# Allegro board ECG_v5.brd
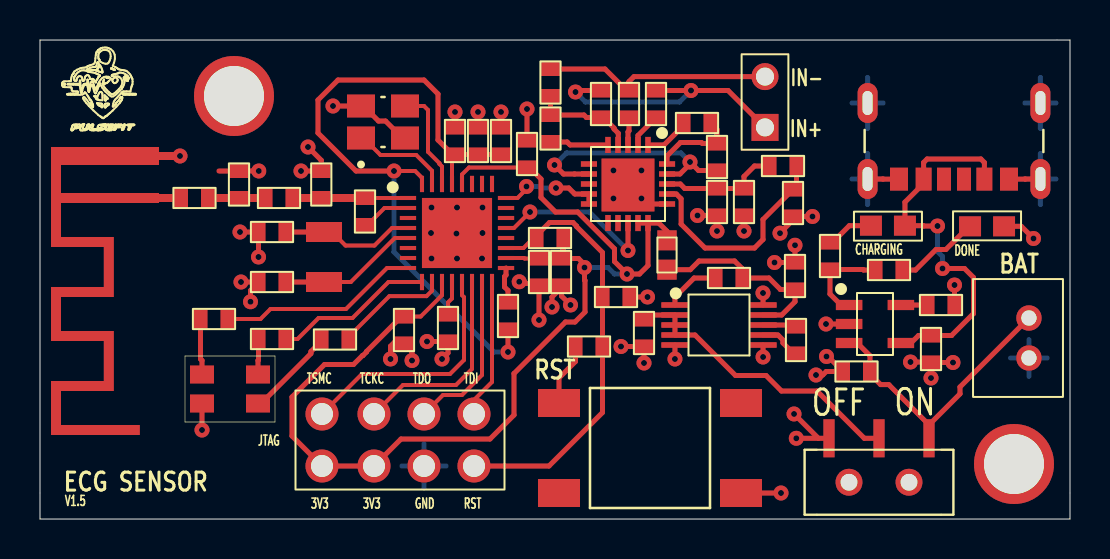
[diagram p0: board, top side]
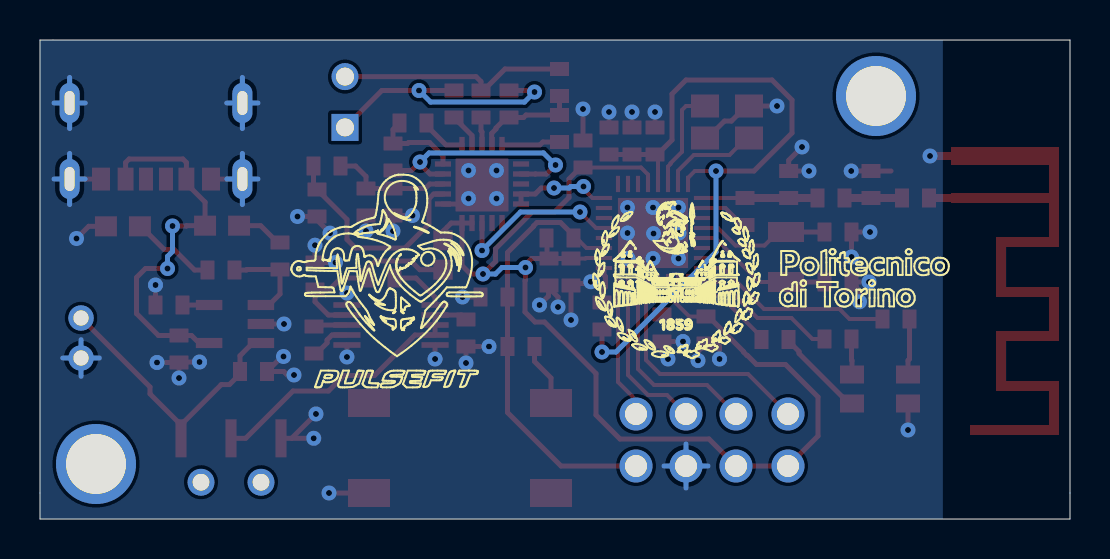
[diagram p1: board, bottom side, seen from below]

Outline 51.5 x 23.95 mm; copper layers: TOP, BOTTOM. Coordinates in mm from the lower left corner of the outline.
Outline path: 0,23.95 51.5,23.95 51.5,0 0,0 0,23.95

## Design rules (mm)
constraint set DEFAULT: min track width 0.15

## Placement (name value [footprint] x y rotation side)
A1  ANTENNA  [AN043_PATCH_ANTENNA]  5.45 19.1 90 top
C1  100nF  [0603_C]  28.8 11.1 0 top
C2  12 pF  [0603_C]  11.6 14.35 0 top
C3  12 pF  [0603_C]  11.6 11.85 0 top
C4  12 pF  [0603_C]  7.73 16.05 0 top
C5  1.2 pF  [0603_C]  14.07 16.73 270 top
C6  1.2 pF  [0603_C]  9.95 16.73 270 top
C7  1 uF  [0603_C]  20.4 9.55 90 top
C8  100 nF  [0603_C]  18.2 9.45 90 top
C9  100 nF  [0603_C]  24.35 18.25 270 top
C10  10 uF  [0603_C]  24.95 12.35 90 top
C11  100 nF  [0603_C]  26.05 12.35 90 top
C12  10 uF  [0603_C]  21.9 18.9 270 top
C13  100 nF  [0603_C]  23.05 18.9 270 top
C14  100 nF  [0603_C]  20.75 18.9 270 top
C15  0.33 uF  [0603_C]  37.8 8.95 270 top
C16  10uF  [0603_C]  37.75 12.15 90 top
C17  10 uF  [0603_C]  30.2 9.3 90 top
C18  4.7uF  [0603_C]  44.55 8.5 90 top
C19  4.7uF  [0603_C]  40.83 7.38 0 top
C20  0.22uF  [0603_C]  32.85 19.8 180 top
C21  1nF  [0603_C]  25.53 19.52 270 top
C22  0.1uF  [0603_C]  37.65 15.8 270 top
C23  0.1uF  [0603_C]  33.85 15.85 270 top
CN1  3-644456-2  [TE_3-644456-2]  36.25 19.58 90 top
CN2  B2B-PH-K-S  [CONN2]  49.45 8.05 270 top
D1  RGB  [RGB_LED]  9.5 6.5 0 top
D2  LTST-S270KGKT  [LED_SMD]  47.35 14.63 180 top
D3  LTST-S270KGKT  [LED_SMD]  42.4 14.67 0 top
FB1  INDUCTOR  [BEADC1608X95N]  31.35 13.2 90 top
J1  4X2  [HEADER4X2]  18 3.95 180 top
J2  UJC-HP-3-SMT-TR  [CUI_UJC-HP-3-SMT-TR]  45.7 17 180 top
L1  15 nH  [0603_L]  16.25 15.38 90 top
L2  2 nH  [0603_L]  11.95 16.05 180 top
L3  10 uH  [0603_L]  23.4 10.15 270 top
NOREF  -  [unnamed]  9.7 21.15 0 top
NOREF#2  -  [#2]  0.92 19.25 0 top
NOREF#3  -  [unnamed]  48.7 2.75 0 top
NOREF#4  -  [#2]  39.35 6.12 180 bottom
NOREF#5  -  [#2]  23.86 8.01 180 bottom
R1  100  [0603_R]  14.75 8.97 180 top
R2  100  [0603_R]  11.6 9 180 top
R3  270  [0603_R]  8.7 10 180 top
R4  10k  [0603_R]  25.5 14.05 180 top
R5  330  [0603_R]  27.45 8.62 180 top
R6  100 k  [0603_R]  34.45 12.05 180 top
R7  8.2k  [0603_R]  45.05 10.7 180 top
R8  150  [0603_R]  39.5 13.15 90 top
R9  150  [0603_R]  42.45 12.45 180 top
R10  180k  [0603_R]  30.8 20.75 90 top
R11  10M  [0603_R]  33.85 18.1 270 top
R12  180k  [0603_R]  29.45 20.75 270 top
R13  10M  [0603_R]  28.05 20.75 270 top
R14  10M  [0603_R]  25.53 21.82 270 top
R15  10M  [0603_R]  37.15 17.65 180 top
R16  10M  [0603_R]  35.2 15.85 270 top
S2  FSM2JSMA  [BUTTON_SMD]  30.5 3.55 0 top
SW1  -  [SWITCH_102AGRLC]  41.95 1.84 90 top
U1  CC2640R2LRHBR  [CC2640]  20.85 14.3 0 top
U2  MAX1759EUB  [MAX1759]  33.95 9.7 0 top
U3  -  [MCP73831]  41.75 9.75 0 top
U4  -  [AD8232]  29.4 16.75 0 top
Y1  TSX-3225_240000MF20X-AC0  [XTAL_24MHZ]  17.15 19.85 90 top
Y2  FC-135R_327680KA-AG0  [XTAL_32_768KHZ]  14.2 13.1 270 top

## Library data of the parts
A1 = ANTENNA_1
C1 C15-C23 = C_1
C2-C14 = Capacitor
CN1 CN2 = 3-644456-2
D1 = XZM2CRKM2DGFBB45SCCB
D2 D3 = LTST-S270KGKT
FB1 = INDUCTOR
J1 = 5X5
J2 = UJC-HP-3-SMT-TR
L1-L3 = Inductor
R1-R16 = R
S2 = 2-1437565-7
SW1 = AYZ0102AGRLC
U1 = CC2640R2LRHBR
U2 = MAX1759EUB
U3 = MCP73831T-2ACIOT_0
U4 = AD8232ACPZ-WP_5
Y1 = TSX-3225_0
Y2 = FC-135R_0

## Footprints (pads in the part's own frame, mm; a bottom-side part is the same pattern mirrored in y, then rotated)
0603_C
  rect 0.7x0.95 smd: 1(-0.675,0) 2(0.675,0)
0603_L
  rect 0.7x0.95 smd: 1(-0.675,0) 2(0.675,0)
0603_R
  rect 0.7x0.95 smd: 1(-0.675,0) 2(0.675,0)
AD8232
  rect 0.275x0.805 smd: 1(1,1.952) 2(0.5,1.952) 3(0,1.952) 4(-0.5,1.952) 5(-1,1.952) 11(-1,-1.952) 12(-0.5,-1.952) 13(0,-1.952) 14(0.5,-1.952) 15(1,-1.952)
  rect 0.805x0.275 smd: 6(-1.952,1) 7(-1.952,0.5) 8(-1.952,0) 9(-1.952,-0.5) 10(-1.952,-1) 16(1.952,-1) 17(1.952,-0.5) 18(1.952,0) 19(1.952,0.5) 20(1.952,1)
  rect 2.65x2.65 smd: HTAB(0,-0.05)
AN043_PATCH_ANTENNA
  rect 0.9x0.5 smd: 1(-0.95,-0.25)
  rect 0.5x0.5 smd: 2(-3.05,-0.25)
BEADC1608X95N
  rect 1x0.97 smd: 1(-0.735,0) 2(0.735,0)
BUTTON_SMD
  rect 2.1x1.4 smd: 1(-4.55,2.25) 2(4.55,2.25) 3(-4.55,-2.25) 4(4.55,-2.25)
CC2640
  rect 0.813x0.203 smd: 1(-2.451,1.75) 2(-2.451,1.25) 3(-2.451,0.75) 4(-2.451,0.25) 5(-2.451,-0.25) 6(-2.451,-0.75) 7(-2.451,-1.25) 8(-2.451,-1.75) 17(2.451,-1.75) 18(2.451,-1.25) 19(2.451,-0.75) 20(2.451,-0.25) 21(2.451,0.25) 22(2.451,0.75) 23(2.451,1.25) 24(2.451,1.75)
  rect 0.203x0.813 smd: 9(-1.75,-2.451) 10(-1.25,-2.451) 11(-0.75,-2.451) 12(-0.25,-2.451) 13(0.25,-2.451) 14(0.75,-2.451) 15(1.25,-2.451) 16(1.75,-2.451) 25(1.75,2.451) 26(1.25,2.451) 27(0.75,2.451) 28(0.25,2.451) 29(-0.25,2.451) 30(-0.75,2.451) 31(-1.25,2.451) 32(-1.75,2.451)
  rect 3.505x3.505 smd: 33(0,0)
CONN2
  round 1.27 hole 0.762: 1(0,0) 2(-2,0)
CUI_UJC-HP-3-SMT-TR
  rect 0.7x1.15 smd: A5(-0.5,0.005) B5(0.5,0.005)
  rect 0.8x1.15 smd: A9(1.52,0.005) B9(-1.52,0.005)
  rect 0.9x1.15 smd: A12(2.75,0.005) B12(-2.75,0.005)
  oval 1x2 hole 0.5x1.2: S1(-4.32,0) S2(4.32,0) S3(-4.32,-3.8) S4(4.32,-3.8)
HEADER4X2
  round 1.65 hole 1.1: 1(-3.7,-1.3) 2(-3.7,1.3) 3(-1.2,-1.3) 4(-1.2,1.3) 5(1.3,-1.3) 6(1.3,1.3) 7(3.9,-1.3) 8(3.9,1.3)
LED_SMD
  rect 1.1x1 smd: 1(-0.85,0) 2(0.85,0)
MAX1759
  rect 1.359x0.279 smd: 1(-2.203,1) 2(-2.203,0.5) 3(-2.203,0) 4(-2.203,-0.5) 5(-2.203,-1) 6(2.203,-1) 7(2.203,-0.5) 8(2.203,0) 9(2.203,0.5) 10(2.203,1)
MCP73831
  rect 1.321x0.508 smd: 1(-1.295,0.95) 2(-1.295,0) 3(-1.295,-0.95) 4(1.295,-0.95) 5(1.295,0.95)
RGB_LED
  rect 1.2x0.9 smd: 1(-1.4,0.725) 2(1.4,0.725) 3(1.4,-0.725) 4(-1.4,-0.725)
SWITCH_102AGRLC
  round 1.346 hole 0.838: (0,1.5) (0,-1.5)
  rect 1.905x0.559 smd: 1(2.197,2.5) 2(2.197,0) 3(2.197,-2.5)
TE_3-644456-2
  rect 1.35x1.35 hole 0.9: 1(0,0)
  round 1.35 hole 0.9: 2(2.54,0)
unnamed
  round 4 hole 3 unplated: (0,0)
XTAL_24MHZ
  rect 1.15x1.4 smd: 1(-0.8,1.1) 2(-0.8,-1.1) 3(0.8,-1.1) 4(0.8,1.1)
XTAL_32_768KHZ
  rect 1x1.8 smd: 1(-1.25,0) 2(1.25,0)

## Nets
3.3V: C8.2(B) C9.2(B) C10.2(B) C11.2(B) FB1.2 J1.6 J1.8 R4.1 U1.11 U1.18 U1.28 U4.14 U4.15
GND: A1.1(GND) C1.2 C2.1 C3.1 C5.1 C6.1 C7.1 C8.1 C9.1 C10.1 C11.1 C12.1 C13.1 C14.1 C16.2 C17.1 C18.1 C19.1 C22.2 C23.2 CN2.1 D1.4 D2.1(K2) J1.4 J2.A12 J2.B12 J2.S1 J2.S2 J2.S3 J2.S4 R7.1 R16.2 S2.4 SW1.1 U1.33 U2.5 U2.6 U2.10 U3.2(VSS) U4.16 U4.HTAB Y1.2 Y1.4(GND#4)
VBAT: C19.2 CN2.2 SW1.3 U3.3
VDDR: C12.2(B) C13.2(B) C14.2(B) L3.2(B) U1.29 U1.32
VIN: C17.2 SW1.2 U2.2 U2.3 U2.4
DCDC_SW: L3.1 U1.17
DCOUPL: C7.2(B) U1.12
ECG: U1.24 U4.9 U4.10
IAOUT: R11.2 U4.7 U4.19
IN+: CN1.1 R10.2 R13.1
IN-: CN1.2 R12.1 R14.1
JTAG_TCKC: J1.5 U1.14
JTAG_TDI: J1.1 U1.16
JTAG_TDO: J1.3 U1.15
JTAG_TMSC: J1.7 U1.13
LED_G: D2.2 R9.1
LED_R: D3.1(K2) R8.2
MCP_STAT: R8.1 R9.2 U3.1
RESET_N: C1.1 J1.2 R4.2 R5.1 U1.19
RF_N: L1.1 U1.2
RF_P: C5.2(B) L1.2(B) L2.1 U1.1
RGB_BLUE: R1.1 U1.10
RGB_GREEN: R2.1 U1.9
RGB_RED: R3.1 U1.8
SDN: U1.21 U4.13
VUSB: C18.2 D3.2 J2.A9 J2.B9(V-BUS#B9) U3.4
X24_N: U1.30 Y1.3
X24_P: U1.31 Y1.1
X32K_Q1: C2.2(B) U1.4 Y2.1
X32K_Q2: C3.2(B) U1.5(X32K_Q2) Y2.2
N71434: C4.2(B) C6.2(B) L2.2(B)
N75000: C15.1 U2.8
N75037: R6.2 U2.1(POK)
N75059: C16.1 FB1.1 R6.1 U2.9
N76094: R7.2 U3.5
N78042: R10.1 U4.2
N78046: R12.2 U4.3
N78162: C21.1 R13.2 R14.2 U4.4
N78759: C20.2 U4.1
N78780: C20.1 R11.1 U4.20
N78887: C22.1 R15.1 U4.17(VS+)
N78958: C23.1 R15.2 R16.1 U4.18
N81014: D1.1(R_A) R3.2
N81018: D1.2 R2.2
N81022: D1.3 R1.2
N81339: R5.2 S2.1
N129274: A1.2 C4.1
N131368: C15.2 U2.7
N134537: C21.2 U4.5

Pads without a net: J2 A5 B5; S2 2 3; U1 3 6 7 20 22 23 25 26 27; U4 6 8 11 12

## Via types
v1: diameter 0.75, hole 0.3, TOP to BOTTOM, 73 vias

## Routing (per net, layer and track width the routed paths; a pad name or vN(x,y) marks a point on that pad's centre or on a via; arc(x,y) is an arc through that point)
3.3V: length 59.1
  TOP w0.2: U1.11 20.1,11.19 19.03,10.12 C8.2 ; C10.2 24.22,13.03 24.2,13.05 U1.18 ; C9.2 21.45,17.57 21.1,17.23 U1.28
  TOP w0.25: R4.1 26.18,14 26.15,13.97 26.15,13.12 C11.2 ; C8.2 18.08,10.12 16.33,8.38 16.33,8.35 16.15,8.18 16.12,8.18 15.68,7.72 14.23,7.72 12.6,6.1 12.6,4.15 J1.8 J1.6 18.05,4 22.5,4 23.7,5.2 23.7,7.28 26.28,9.85 26.75,9.85 27.25,10.35 27.25,11.92 27.23,11.95 v1(27.23,12.57) 27.23,12.72 26.93,13.03 C11.2 ; FB1.2 31.35,14.39 30.94,14.8 U4.15 ; C11.2 C10.2 ; C9.2 24.48,17.57 25.05,17 25.05,16.07 25.78,15.35 26.88,15.35 28.73,13.51 28.73,12.88 v1(29.35,12.25) 29.98,12.25 30.4,12.67 U4.15 ; U4.15 U4.14
  BOTTOM w0.25: v1(27.23,12.57) 28.4,12.57 28.72,12.25 v1(29.35,12.25)
GND: length 84.1
  TOP w0.25: v1(32.88,15.18) C23.2 v1(33.85,14.4) ; J2.B12 49.26,16.99 49.27,17 J2.S1 ; v1(45.65,7.83) C18.1 ; C18.1 v1(44.55,7.05) ; C18.1 44.53,7.85 v1(43.53,7.85) ; U2.10 36.15,11.09 36.15,11.1 v1(36.15,11.3) ; C12.1 v1(21.9,20.35) ; v1(30.07,16.03) 30.35,15.75 U4.16 ; v1(10.53,10.86) 10.53,11.42 10.69,11.59 10.69,11.61 C3.1 ; Y1.2 18.13,19.05 17.28,19.9 16.93,19.9 16.17,20.65 Y1.4 v1(14.65,20.65) ; v1(30.2,7.8) C17.1 v1(29.05,8.62) ; 26.02,11.52 26.02,11.64 C11.1 ; 26.02,11.52 26.07,11.47 26.07,11.15 v1(26.53,10.7) ; 26.02,11.52 25.6,11.1 v1(25.6,10.6) ; v1(36.73,12.82) C16.2 v1(37.75,13.69) ; U2.5 v1(31.75,8) ; v1(49.67,14.03) 49.07,14.63 D2.1 ; v1(39.33,8.12) 39.4,8.12 C19.1 39.31,7.38 39.14,7.2 v1(38.8,7.2) ; v1(13.05,17.4) C5.1 14.07,17.94 v1(13.4,18.6) ; C3.1 v1(10.05,11.85) ; C3.1 10.93,11.72 ; SW1.1 38.92,4.04 ; 38.92,4.04 v1(37.7,5.25) ; 38.92,4.04 v1(37.81,4.04) ; v1(18.6,7.92) 18.6,8.38 18.15,8.82 17.71,8.82 17.52,8.64 v1(17.52,8) ; U3.2 v1(39.3,9.75) ; C13.1 v1(23.05,20.35) ; 8.95,17.4 C6.1 v1(10.94,17.4) ; C14.1 v1(20.75,20.35) ; C9.1 v1(24.35,20.5) ; J2.S2 42.14,17 42.15,16.99 J2.A12 ; R16.2 v1(35.2,14.4) ; v1(24.95,9.95) C10.1 24.85,11.78 24.3,11.78 24.21,11.86 v1(23.96,11.86) ; S2.4 v1(37.05,1.3) ; v1(10.93,13.1) C2.1 v1(10,14.35) ; D1.4 v1(8.1,4.45) ; v1(38.62,15.12) C22.2 37.65,14.95 37,14.3 v1(37,14.29) ; v1(30.38,11.1) C1.2 ; v1(20.1,8) 20.4,8.3 C7.1 v1(19.35,8.88) ; R7.1 v1(45.73,11.7) ; U2.6 v1(36.15,8.1)
  TOP w0.4: A1.1 v1(7,18.15)
  BOTTOM w0.254: J2.S1 50.8,17 ; J2.S1 50.02,15.72 ; J2.S1 49.24,17 ; J2.S1 50.02,18.28 ; J2.S3 50.8,20.8 ; J2.S3 50.02,22.08 ; J2.S3 50.02,19.52 ; J2.S3 49.24,20.8 ; 18.1,2.65 J1.4 ; J1.4 19.2,3.75 ; J1.4 20.3,2.65 ; J1.4 19.2,1.55 ; CN2.1 50.36,8.05 ; CN2.1 48.54,8.05 ; CN2.1 49.45,8.96 ; CN2.1 49.45,7.14 ; 40.6,17 J2.S2 ; J2.S2 41.38,15.72 ; J2.S2 41.38,18.28 ; J2.S2 42.16,17 ; 40.6,20.8 J2.S4 ; J2.S4 41.38,22.08 ; J2.S4 41.38,19.52 ; J2.S4 42.16,20.8
  vias: v1(19.55,14.3) v1(19.57,15.57) v1(19.57,13.03) v1(20.85,15.57) v1(20.82,14.27) v1(20.85,13.03) v1(22.12,15.57) v1(22.12,14.3) v1(22.1,13.03) v1(28.67,17.43) v1(28.67,16.03) v1(30.07,17.43)
VBAT: length 14.3
  TOP w0.25: 44.45,4.71 42.44,6.72 42.03,6.72 41.5,7.25 C19.2 41.5,8.16 40.86,8.8 U3.3 ; 44.45,4.71 SW1.3 ; 44.45,4.71 46,6.26 46,6.6 CN2.2
VDDR: length 35
  TOP w0.2: U1.29 20.6,17.98 20.75,18.12 C14.2 ; U1.32 19.1,17.06 18.76,17.4 v1(17.7,17.4)
  TOP w0.25: 23.4,9.47 v1(23.4,8.35) ; v1(17.7,17.4) 15.8,17.4 13.9,19.3 13.9,20.95 14.9,21.95 19.2,21.95 19.9,21.25 19.9,18.95 20.62,18.23 C14.2 C12.2 C13.2
  BOTTOM w0.25: v1(23.4,8.35) 22.7,8.35 17.7,13.35 v1(17.7,17.4)
VIN: length 15
  TOP w0.25: SW1.2 41.21,4.04 38.85,6.4 37.08,6.4 36.3,7.17 34.77,7.17 32.75,9.2 U2.4 U2.3 U2.2 30.43,10.2 C17.2
DCDC_SW: length 1.8
  TOP w0.25: U1.17 23.3,12.2 23.23,12.12 23.23,11.6 23.4,11.43 L3.1
DCOUPL: length 1.7
  TOP w0.2: U1.12 20.6,11.03 20.4,10.83 C7.2
ECG: length 5.1
  TOP w0.2: v1(24.32,16.62) 24.32,16.5 23.88,16.05 U1.24
  TOP w0.25: U4.10 U4.9 26.74,16.25 26.44,16.55 v1(25.8,16.55)
  BOTTOM w0.25: v1(25.8,16.55) 25.04,16.55 24.96,16.62 v1(24.32,16.62)
IAOUT: length 12.1
  TOP w0.25: U4.19 32,17.25 32.5,17.75 v1(32.5,17.85) 32.92,17.43 R11.2 ; v1(25.73,17.7) 26.18,17.25 26.72,17.25 26.73,17.25 U4.7
  BOTTOM w0.25: v1(32.5,17.85) 32.05,18.3 26.33,18.3 v1(25.73,17.7)
IN+: length 13.7
  TOP w0.25: R13.1 26.85,21.43 v1(26.78,21.35) ; R10.2 v1(32.55,21.43) 34.41,21.43 CN1.1
  BOTTOM w0.25: v1(32.55,21.43) 31.98,20.85 27.28,20.85 v1(26.78,21.35)
IN-: length 11.7
  TOP w0.25: CN1.2 29.7,22.12 29.45,21.87 R12.1 29.33,21.43 28.25,22.5 R14.1
JTAG_TCKC: length 10.2
  TOP w0.2: U1.14 21.6,11.19 21.6,7.5 20.8,6.7 18.15,6.7 J1.5
JTAG_TDI: length 7
  TOP w0.2: U1.16 22.6,11.19 22.6,6.85 21.65,5.9 21.65,5.3 J1.1
JTAG_TDO: length 8.4
  TOP w0.2: U1.15 22.1,11.19 22.1,7.2 21.1,6.2 20.15,6.2 J1.3
JTAG_TMSC: length 12.2
  TOP w0.2: J1.7 16.1,7.25 20.5,7.25 21.2,7.95 21.2,11.09 21.1,11.19 U1.13
LED_G: length 4.3
  TOP w0.25: R9.1 43.78,12.45 44.8,13.47 45.29,13.47 46.45,14.63 D2.2
LED_R: length 2.4
  TOP w0.25: R8.2 39.62,13.82 40.47,14.67 D3.1
MCP_STAT: length 4.7
  TOP w0.25: 41.78,12.45 41.17,12.45 41.15,12.47 R8.1 39.5,11.25 40.05,10.7 U3.1
RESET_N: length 21.6
  TOP w0.2: U1.19 24.17,13.55 24.62,14 24.78,14 24.82,14.05
  TOP w0.25: 24.82,14.05 24.82,14.18 25.48,14.82 26.65,14.82 26.82,14.65 26.82,14.62 28.12,13.32 C1.1 R5.1 28.12,5.33 25.45,2.65 J1.2
RF_N: length 2.5
  TOP w0.2: L1.1 16.38,14.7 17.22,15.55 U1.2
RF_P: length 5.8
  TOP w0.2: U1.1 L1.2
  TOP w0.4: L1.2 C5.2 12.62,16.05
RGB_BLUE: length 5.7
  TOP w0.2: 15.43,8.97 15.43,9.1 17.47,11.14 19.33,11.14 19.6,11.42 U1.10
RGB_GREEN: length 8
  TOP w0.2: U1.9 17.42,11.85 15.62,10.05 13.93,10.05 12.88,9 R2.1
RGB_RED: length 10.1
  TOP w0.2: R3.1 11.03,10 11.53,10.5 15.3,10.5 17.35,12.55 U1.8
SDN: length 8.6
  TOP w0.2: U1.21 23.7,14.55 v1(24.5,15.35)
  TOP w0.25: v1(29.4,13.43) U4.13
  BOTTOM w0.25: v1(24.5,15.35) 27.48,15.35 v1(29.4,13.43)
VUSB: length 19.2
  TOP w0.25: v1(44.88,14.65) 44.19,14.65 44.17,14.67 D3.2 43.25,15.84 44.18,16.78 J2.A9 44.18,17.82 44.36,18 47.04,18 47.22,17.82 J2.B9 ; v1(45.12,12.53) 46.22,12.53 46.67,12.07 46.67,10.27 45.58,9.18 C18.2 43.92,9.18 43.55,8.8 U3.4
  BOTTOM w0.25: v1(45.12,12.53) 45.12,13.13 44.88,13.38 v1(44.88,14.65)
X24_N: length 5.2
  TOP w0.2: Y1.3 19.2,20.65 19.4,20.45 19.4,18.36 19.98,17.79 19.98,17.75 20.1,17.63 U1.30
X24_P: length 4.9
  TOP w0.2: Y1.1 16.17,19.05 17.02,18.2 17.44,18.2 18.81,18.2 19.6,17.41 U1.31
X32K_Q1: length 6.8
  TOP w0.2: U1.4 17.6,14.55 16.72,13.67 15.28,13.67 14.6,14.35 Y2.1
  TOP w0.25: Y2.1 C2.2
X32K_Q2: length 7
  TOP w0.2: Y2.2 15.54,11.85 17.74,14.05 U1.5
  TOP w0.25: Y2.2 C3.2
N71434: length 2.9
  TOP w0.4: C4.2 C6.2 L2.2
N75000: length 1.7
  TOP w0.25: C15.1 37.5,9.62 37.42,9.7 U2.8
N75037: length 2.8
  TOP w0.25: U2.1 31.75,11.09 32.7,12.05 R6.2
N75059: length 9.9
  TOP w0.25: U2.9 37.08,10.2 37.75,10.87 C16.1 37.02,11.47 36.45,12.05 35.12,12.05 35.12,12.5 34.73,12.9 32.95,12.9 32.52,12.46 FB1.1
N76094: length 1.3
  TOP w0.25: U3.5 R7.2
N78042: length 1.7
  TOP w0.25: U4.2 29.9,19.18 R10.1
N78046: length 1.4
  TOP w0.25: U4.3 29.4,19.36 29.45,19.41 R12.2
N78162: length 5.3
  TOP w0.25: U4.4 28.92,18.72 28.92,19.28 28.7,19.5 28.7,19.55 28.18,20.07 R13.2 27.32,20.07 27.2,20.2 C21.1 R14.2
N78759: length 2.3
  TOP w0.25: C20.2 32.17,19.68 31.2,18.7 U4.1
N78780: length 4.4
  TOP w0.25: 33.52,19.8 33.85,19.48 R11.1 33.12,18.77 33.07,18.82 32.02,18.82 31.35,18.15 U4.20
N78887: length 11.3
  TOP w0.25: R15.1 37.83,16.77 37.52,16.48 ; 37.52,16.48 37.52,16.35 36.15,14.97 36.15,13.97 35.73,13.55 33.25,13.55 32.05,14.75 32.05,16.01 31.82,16.25 U4.17 ; 37.52,16.48 C22.1
N78958: length 6
  TOP w0.25: U4.18 32.01,16.75 32.24,16.52 C23.1 R16.1 35.2,17.13 35.72,17.65 36.48,17.65
N81014: length 2.8
  TOP w0.25: R3.2 8.03,8 8.1,7.93 D1.1
N81018: length 1.8
  TOP w0.25: R2.2 10.93,7.95 10.9,7.93 D1.2
N81022: length 4.6
  TOP w0.25: D1.3 11.05,5.78 13.55,8.27 13.55,8.37 14.08,8.9 14.08,8.97
N81339: length 3.2
  TOP w0.25: S2.1 25.95,7.05 26.78,7.88 26.78,8.62
N129274: length 1.4
  TOP w0.4: C4.1 A1.2
N131368: length 2.1
  TOP w0.25: U2.7 36.9,9.2 37.15,8.95 37.15,8.8 37.67,8.28 37.8,8.28
N134537: length 2.9
  TOP w0.25: U4.5 26.5,18.7 26.36,18.85 C21.2

## Copper pours and planes (outline as drawn; the poured copper is in the pictures)
GND on BOTTOM: 51.5,23.95 51.5,0 6.35,0 6.35,23.95
N129274 on TOP (solid shape): 5.45,17.7 1.05,17.7 1.05,16.3 5.45,16.3 5.45,15.8 1.05,15.8 1.05,14.1 3.69,14.1 3.69,11.1 1.05,11.1 1.05,9.4 3.69,9.4 3.69,6.4 1.05,6.4 1.05,4.7 4.99,4.7 4.99,4.2 0.55,4.2 0.55,6.9 3.19,6.9 3.19,8.9 0.55,8.9 0.55,11.6 3.19,11.6 3.19,13.6 0.55,13.6 0.55,18.6 5.45,18.6

## Text on the board
Ref Des/Silkscreen Top: V1.5 | JTAG | TSMC | 3V3 | TCKC | TDO | GND | TDI | RST | CHARGING | DONE | IN+ | IN- | ECG SENSOR | BAT | OFF | ON
